# EAGLE board mic_sensor_arduino_panelized-Panel (EAGLE 9.6.2), part 1 of 3
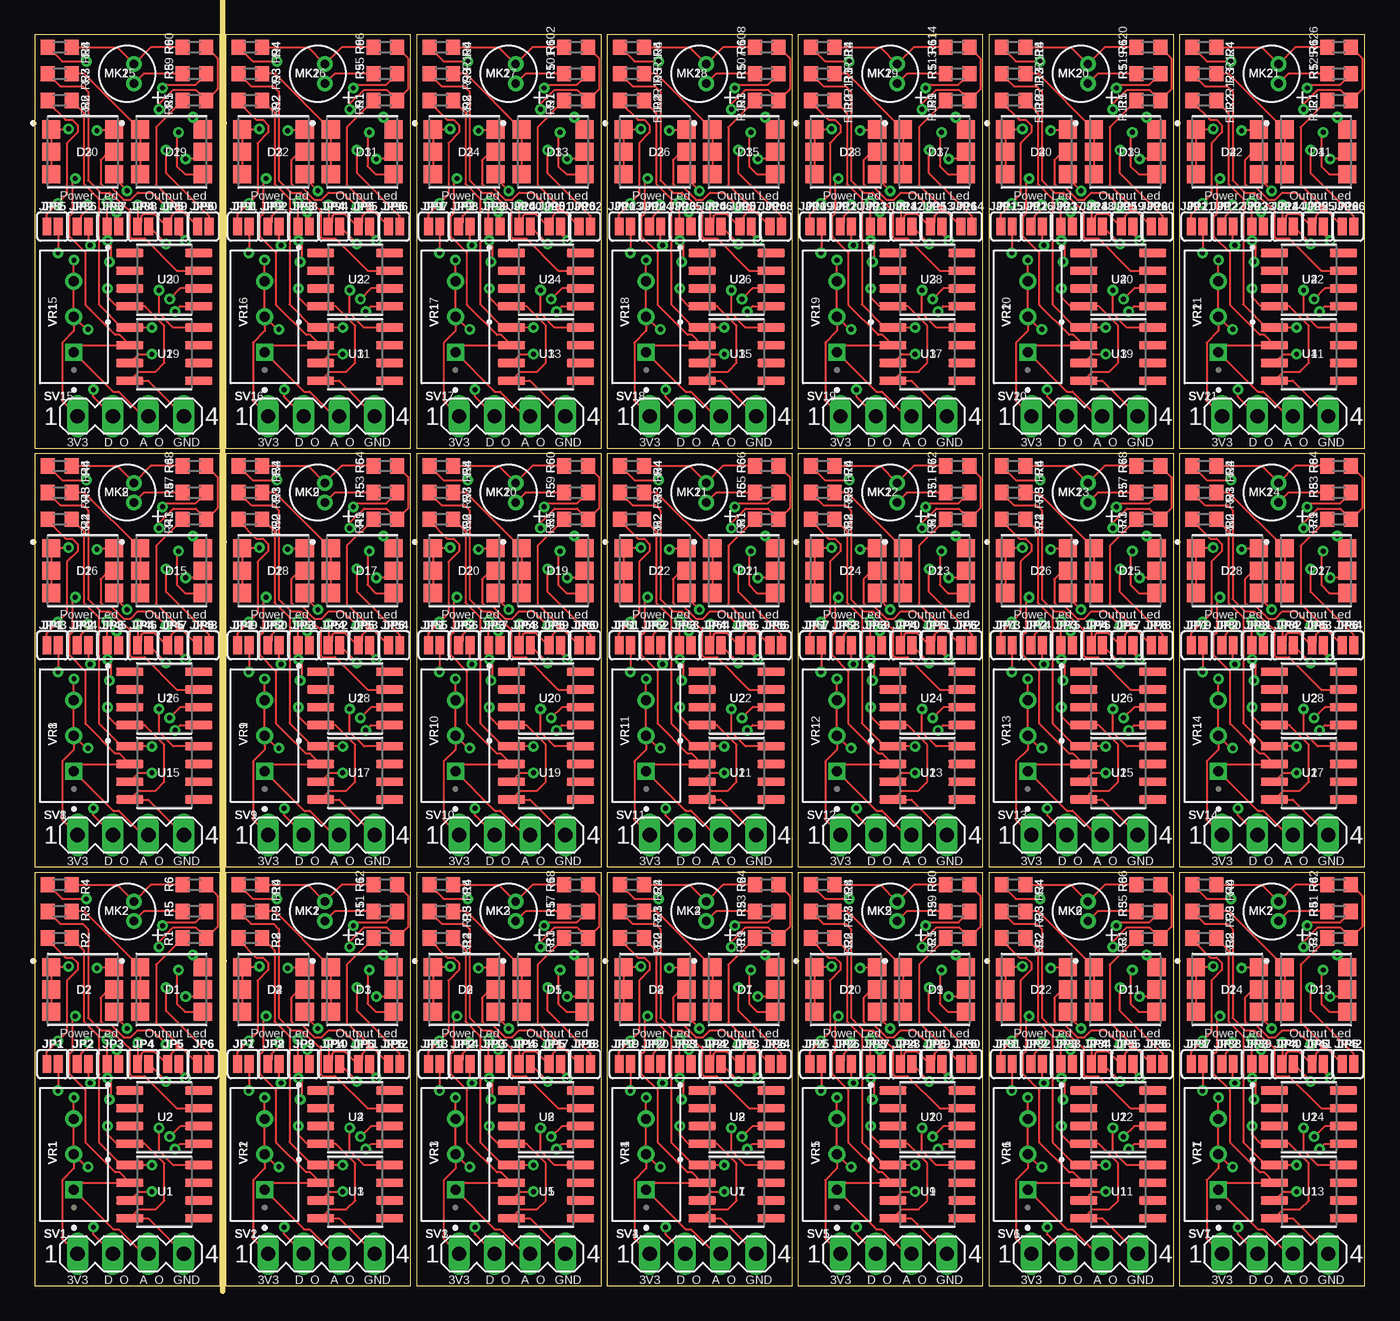
[diagram p0: board, top side]
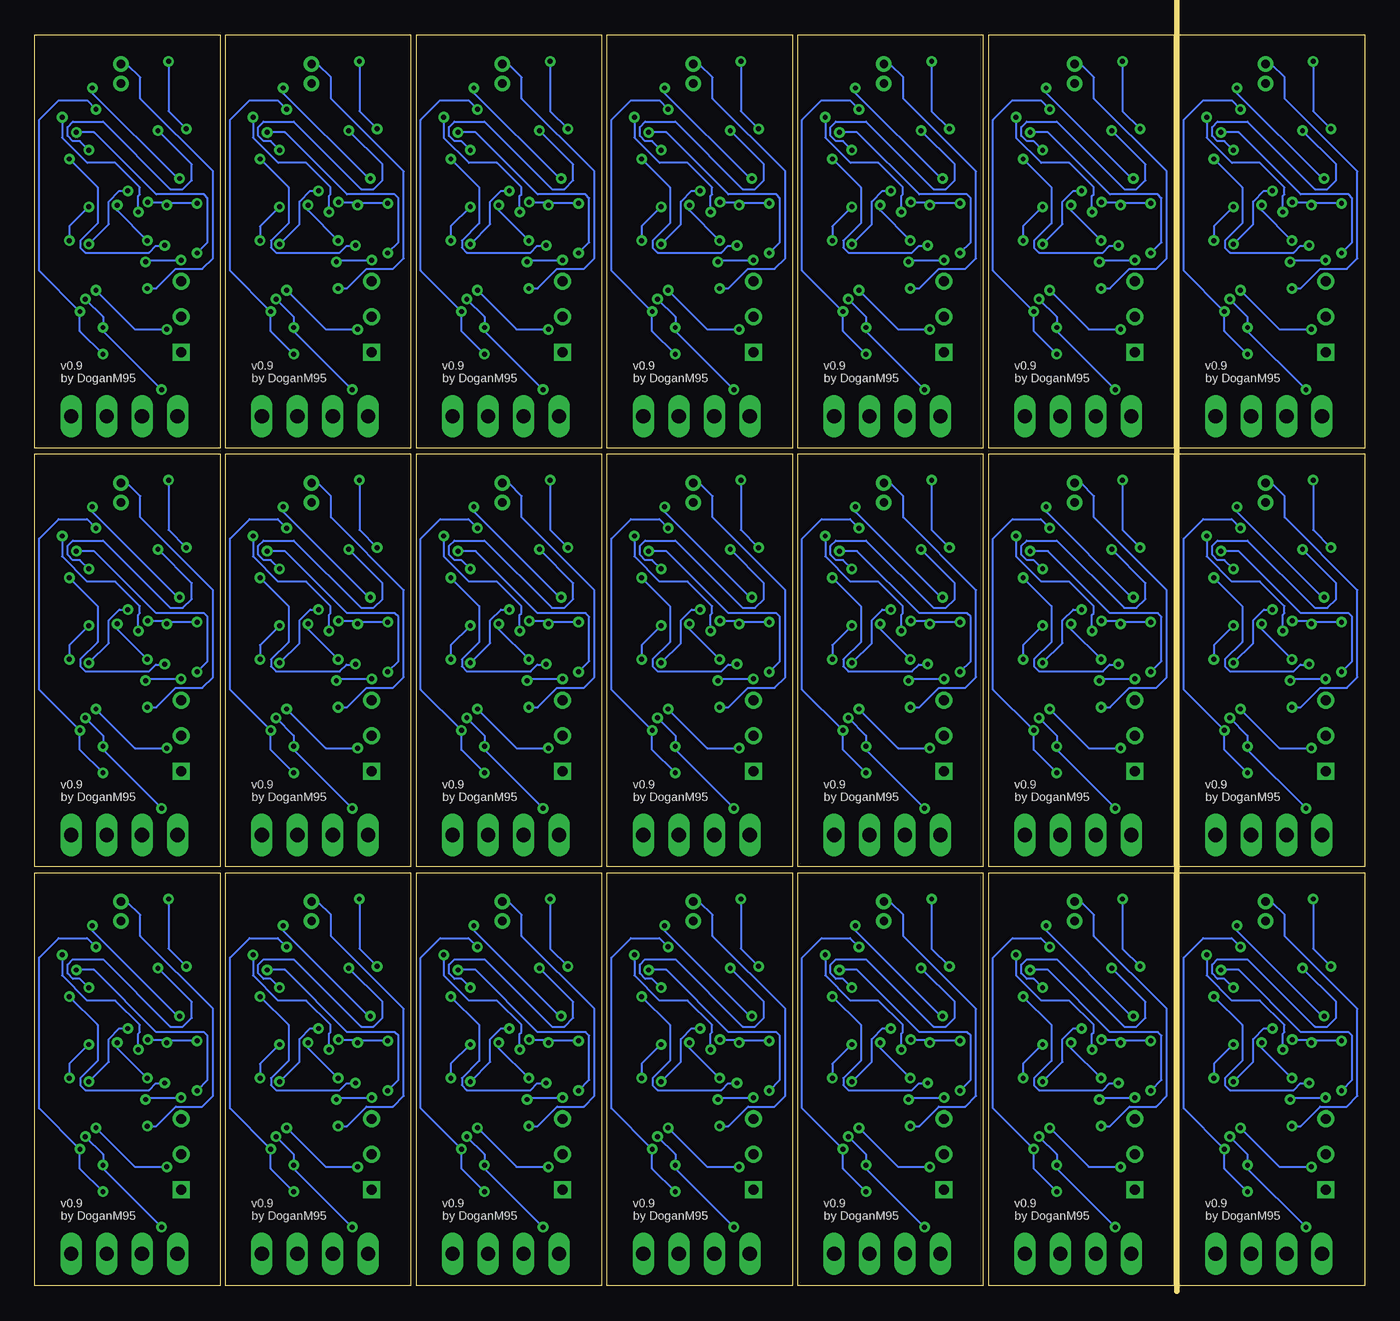
[diagram p1: board, bottom side, seen from below]

Size 95.22 x 89.54 mm. Coordinates in mm from the lower left corner, seen from the top.
Outline: 0,0 13.26,0 13.26,29.58 0,29.58 0,0
Outline: 13.66,0 26.92,0 26.92,29.58 13.66,29.58 13.66,0
Outline: 27.32,0 40.58,0 40.58,29.58 27.32,29.58 27.32,0
Outline: 40.98,0 54.24,0 54.24,29.58 40.98,29.58 40.98,0
Outline: 54.64,0 67.9,0 67.9,29.58 54.64,29.58 54.64,0
Outline: 68.3,0 81.56,0 81.56,29.58 68.3,29.58 68.3,0
Outline: 81.96,0 95.22,0 95.22,29.58 81.96,29.58 81.96,0
Outline: 0,29.98 13.26,29.98 13.26,59.56 0,59.56 0,29.98
Outline: 13.66,29.98 26.92,29.98 26.92,59.56 13.66,59.56 13.66,29.98
Outline: 27.32,29.98 40.58,29.98 40.58,59.56 27.32,59.56 27.32,29.98
Outline: 40.98,29.98 54.24,29.98 54.24,59.56 40.98,59.56 40.98,29.98
Outline: 54.64,29.98 67.9,29.98 67.9,59.56 54.64,59.56 54.64,29.98
Outline: 68.3,29.98 81.56,29.98 81.56,59.56 68.3,59.56 68.3,29.98
Outline: 81.96,29.98 95.22,29.98 95.22,59.56 81.96,59.56 81.96,29.98
Outline: 0,59.96 13.26,59.96 13.26,89.54 0,89.54 0,59.96
Outline: 13.66,59.96 26.92,59.96 26.92,89.54 13.66,89.54 13.66,59.96
Outline: 27.32,59.96 40.58,59.96 40.58,89.54 27.32,89.54 27.32,59.96
Outline: 40.98,59.96 54.24,59.96 54.24,89.54 40.98,89.54 40.98,59.96
Outline: 54.64,59.96 67.9,59.96 67.9,89.54 54.64,89.54 54.64,59.96
Outline: 68.3,59.96 81.56,59.96 81.56,89.54 68.3,89.54 68.3,59.96
Outline: 81.96,59.96 95.22,59.96 95.22,89.54 81.96,89.54 81.96,59.96
Copper layers (1*16): Top 0.035mm / dielectric 1.5mm / Bottom 0.035mm
Design rules "mic_sensor_arduino_panelized": minimum track width 6mil, minimum drill 0.35mm, track to track 6mil, track to pad 6mil, pad to pad 6mil, via to via 6mil, smd to smd 6mil, copper to edge 40mil, drill to drill 6mil, minimum pad ring 10mil, minimum via ring 8mil, stop-mask expansion 4mil, vias tented up to drill 20mil, thermal gap 10mil
Milling: 1 lines

## Footprints (pad centres in the part's own frame; a part is rotated, then mirrored left to right if it is on the bottom)
LED_LTST-G563ZEGBW = smd 1.3 x 1.3: 1 -2.25,1.6; 2 -2.25,0; 3 -2.25,-1.6; 4 2.25,-1.6; 5 2.25,0; 6 2.25,1.6
SMT-JUMPER_2_NO_SILK = smd 0.635 x 1.27: 1 -0.406,0; 2 0.406,0
MIC_CMC-4015-40P = drill 0.6: M 0.5,0.7; P 0.5,-0.7
R0603 = smd 1 x 1.1: 1 -0.85,0; 2 0.85,0
MA04-1 = drill 1.016 long: 1 -3.81,0; 2 -1.27,0; 3 1.27,0; 4 3.81,0
SOIC127P599X175-8N = smd 1.97 x 0.6: 1 -2.47,1.905; 2 -2.47,0.635; 3 -2.47,-0.635; 4 -2.47,-1.905; 5 2.47,-1.905; 6 2.47,-0.635; 7 2.47,0.635; 8 2.47,1.905
TRIM_3296W-1-103RLF = drill 0.71 square: 1 -2.54,0 | drill 0.71: 2 0,0; 3 2.54,0

## Placement (x,y rotation side)
D1  OUT_LTST-G563ZEGBW  [LED_LTST-G563ZEGBW]  9.78,21.21 0 top
D2  PWR_LTST-G563ZEGBW  [LED_LTST-G563ZEGBW]  3.43,21.21 0 top
D3  OUT_LTST-G563ZEGBW  [LED_LTST-G563ZEGBW]  23.44,21.21 0 top
D4  PWR_LTST-G563ZEGBW  [LED_LTST-G563ZEGBW]  17.09,21.21 0 top
D5  OUT_LTST-G563ZEGBW  [LED_LTST-G563ZEGBW]  37.1,21.21 0 top
D6  PWR_LTST-G563ZEGBW  [LED_LTST-G563ZEGBW]  30.75,21.21 0 top
D7  OUT_LTST-G563ZEGBW  [LED_LTST-G563ZEGBW]  50.76,21.21 0 top
D8  PWR_LTST-G563ZEGBW  [LED_LTST-G563ZEGBW]  44.41,21.21 0 top
D9  OUT_LTST-G563ZEGBW  [LED_LTST-G563ZEGBW]  64.42,21.21 0 top
D10  PWR_LTST-G563ZEGBW  [LED_LTST-G563ZEGBW]  58.07,21.21 0 top
D11  OUT_LTST-G563ZEGBW  [LED_LTST-G563ZEGBW]  78.08,21.21 0 top
D12  PWR_LTST-G563ZEGBW  [LED_LTST-G563ZEGBW]  71.73,21.21 0 top
D13  OUT_LTST-G563ZEGBW  [LED_LTST-G563ZEGBW]  91.74,21.21 0 top
D14  PWR_LTST-G563ZEGBW  [LED_LTST-G563ZEGBW]  85.39,21.21 0 top
D15  OUT_LTST-G563ZEGBW  [LED_LTST-G563ZEGBW]  9.78,51.19 0 top
D16  PWR_LTST-G563ZEGBW  [LED_LTST-G563ZEGBW]  3.43,51.19 0 top
D17  OUT_LTST-G563ZEGBW  [LED_LTST-G563ZEGBW]  23.44,51.19 0 top
D18  PWR_LTST-G563ZEGBW  [LED_LTST-G563ZEGBW]  17.09,51.19 0 top
D19  OUT_LTST-G563ZEGBW  [LED_LTST-G563ZEGBW]  37.1,51.19 0 top
D20  PWR_LTST-G563ZEGBW  [LED_LTST-G563ZEGBW]  30.75,51.19 0 top
D21  OUT_LTST-G563ZEGBW  [LED_LTST-G563ZEGBW]  50.76,51.19 0 top
D22  PWR_LTST-G563ZEGBW  [LED_LTST-G563ZEGBW]  44.41,51.19 0 top
D23  OUT_LTST-G563ZEGBW  [LED_LTST-G563ZEGBW]  64.42,51.19 0 top
D24  PWR_LTST-G563ZEGBW  [LED_LTST-G563ZEGBW]  58.07,51.19 0 top
D25  OUT_LTST-G563ZEGBW  [LED_LTST-G563ZEGBW]  78.08,51.19 0 top
D26  PWR_LTST-G563ZEGBW  [LED_LTST-G563ZEGBW]  71.73,51.19 0 top
D27  OUT_LTST-G563ZEGBW  [LED_LTST-G563ZEGBW]  91.74,51.19 0 top
D28  PWR_LTST-G563ZEGBW  [LED_LTST-G563ZEGBW]  85.39,51.19 0 top
D29  OUT_LTST-G563ZEGBW  [LED_LTST-G563ZEGBW]  9.78,81.17 0 top
D30  PWR_LTST-G563ZEGBW  [LED_LTST-G563ZEGBW]  3.43,81.17 0 top
D31  OUT_LTST-G563ZEGBW  [LED_LTST-G563ZEGBW]  23.44,81.17 0 top
D32  PWR_LTST-G563ZEGBW  [LED_LTST-G563ZEGBW]  17.09,81.17 0 top
D33  OUT_LTST-G563ZEGBW  [LED_LTST-G563ZEGBW]  37.1,81.17 0 top
D34  PWR_LTST-G563ZEGBW  [LED_LTST-G563ZEGBW]  30.75,81.17 0 top
D35  OUT_LTST-G563ZEGBW  [LED_LTST-G563ZEGBW]  50.76,81.17 0 top
D36  PWR_LTST-G563ZEGBW  [LED_LTST-G563ZEGBW]  44.41,81.17 0 top
D37  OUT_LTST-G563ZEGBW  [LED_LTST-G563ZEGBW]  64.42,81.17 0 top
D38  PWR_LTST-G563ZEGBW  [LED_LTST-G563ZEGBW]  58.07,81.17 0 top
D39  OUT_LTST-G563ZEGBW  [LED_LTST-G563ZEGBW]  78.08,81.17 0 top
D40  PWR_LTST-G563ZEGBW  [LED_LTST-G563ZEGBW]  71.73,81.17 0 top
D41  OUT_LTST-G563ZEGBW  [LED_LTST-G563ZEGBW]  91.74,81.17 0 top
D42  PWR_LTST-G563ZEGBW  [LED_LTST-G563ZEGBW]  85.39,81.17 0 top
JP1  RED  [SMT-JUMPER_2_NO_SILK]  1.27,15.88 0 top
JP2  GREEN  [SMT-JUMPER_2_NO_SILK]  3.43,15.88 0 top
JP3  BLUE  [SMT-JUMPER_2_NO_SILK]  5.59,15.88 0 top
JP4  RED  [SMT-JUMPER_2_NO_SILK]  7.75,15.88 0 top
JP5  Green  [SMT-JUMPER_2_NO_SILK]  9.91,15.88 0 top
JP6  Blue  [SMT-JUMPER_2_NO_SILK]  12.06,15.88 0 top
JP7  RED  [SMT-JUMPER_2_NO_SILK]  14.93,15.88 0 top
JP8  GREEN  [SMT-JUMPER_2_NO_SILK]  17.09,15.88 0 top
JP9  BLUE  [SMT-JUMPER_2_NO_SILK]  19.25,15.88 0 top
JP10  RED  [SMT-JUMPER_2_NO_SILK]  21.41,15.88 0 top
JP11  Green  [SMT-JUMPER_2_NO_SILK]  23.57,15.88 0 top
JP12  Blue  [SMT-JUMPER_2_NO_SILK]  25.73,15.88 0 top
JP13  RED  [SMT-JUMPER_2_NO_SILK]  28.59,15.88 0 top
JP14  GREEN  [SMT-JUMPER_2_NO_SILK]  30.75,15.88 0 top
JP15  BLUE  [SMT-JUMPER_2_NO_SILK]  32.91,15.88 0 top
JP16  RED  [SMT-JUMPER_2_NO_SILK]  35.07,15.88 0 top
JP17  Green  [SMT-JUMPER_2_NO_SILK]  37.23,15.88 0 top
JP18  Blue  [SMT-JUMPER_2_NO_SILK]  39.39,15.88 0 top
JP19  RED  [SMT-JUMPER_2_NO_SILK]  42.25,15.88 0 top
JP20  GREEN  [SMT-JUMPER_2_NO_SILK]  44.41,15.88 0 top
JP21  BLUE  [SMT-JUMPER_2_NO_SILK]  46.57,15.88 0 top
JP22  RED  [SMT-JUMPER_2_NO_SILK]  48.73,15.88 0 top
JP23  Green  [SMT-JUMPER_2_NO_SILK]  50.89,15.88 0 top
JP24  Blue  [SMT-JUMPER_2_NO_SILK]  53.05,15.88 0 top
JP25  RED  [SMT-JUMPER_2_NO_SILK]  55.91,15.88 0 top
JP26  GREEN  [SMT-JUMPER_2_NO_SILK]  58.07,15.88 0 top
JP27  BLUE  [SMT-JUMPER_2_NO_SILK]  60.23,15.88 0 top
JP28  RED  [SMT-JUMPER_2_NO_SILK]  62.39,15.88 0 top
JP29  Green  [SMT-JUMPER_2_NO_SILK]  64.55,15.88 0 top
JP30  Blue  [SMT-JUMPER_2_NO_SILK]  66.71,15.88 0 top
JP31  RED  [SMT-JUMPER_2_NO_SILK]  69.57,15.88 0 top
JP32  GREEN  [SMT-JUMPER_2_NO_SILK]  71.73,15.88 0 top
JP33  BLUE  [SMT-JUMPER_2_NO_SILK]  73.89,15.88 0 top
JP34  RED  [SMT-JUMPER_2_NO_SILK]  76.05,15.88 0 top
JP35  Green  [SMT-JUMPER_2_NO_SILK]  78.21,15.88 0 top
JP36  Blue  [SMT-JUMPER_2_NO_SILK]  80.37,15.88 0 top
JP37  RED  [SMT-JUMPER_2_NO_SILK]  83.23,15.88 0 top
JP38  GREEN  [SMT-JUMPER_2_NO_SILK]  85.39,15.88 0 top
JP39  BLUE  [SMT-JUMPER_2_NO_SILK]  87.55,15.88 0 top
JP40  RED  [SMT-JUMPER_2_NO_SILK]  89.71,15.88 0 top
JP41  Green  [SMT-JUMPER_2_NO_SILK]  91.87,15.88 0 top
JP42  Blue  [SMT-JUMPER_2_NO_SILK]  94.03,15.88 0 top
JP43  RED  [SMT-JUMPER_2_NO_SILK]  1.27,45.85 0 top
JP44  GREEN  [SMT-JUMPER_2_NO_SILK]  3.43,45.85 0 top
JP45  BLUE  [SMT-JUMPER_2_NO_SILK]  5.59,45.85 0 top
JP46  RED  [SMT-JUMPER_2_NO_SILK]  7.75,45.85 0 top
JP47  Green  [SMT-JUMPER_2_NO_SILK]  9.91,45.85 0 top
JP48  Blue  [SMT-JUMPER_2_NO_SILK]  12.06,45.85 0 top
JP49  RED  [SMT-JUMPER_2_NO_SILK]  14.93,45.85 0 top
JP50  GREEN  [SMT-JUMPER_2_NO_SILK]  17.09,45.85 0 top
JP51  BLUE  [SMT-JUMPER_2_NO_SILK]  19.25,45.85 0 top
JP52  RED  [SMT-JUMPER_2_NO_SILK]  21.41,45.85 0 top
JP53  Green  [SMT-JUMPER_2_NO_SILK]  23.57,45.85 0 top
JP54  Blue  [SMT-JUMPER_2_NO_SILK]  25.73,45.85 0 top
JP55  RED  [SMT-JUMPER_2_NO_SILK]  28.59,45.85 0 top
JP56  GREEN  [SMT-JUMPER_2_NO_SILK]  30.75,45.85 0 top
JP57  BLUE  [SMT-JUMPER_2_NO_SILK]  32.91,45.85 0 top
JP58  RED  [SMT-JUMPER_2_NO_SILK]  35.07,45.85 0 top
JP59  Green  [SMT-JUMPER_2_NO_SILK]  37.23,45.85 0 top
JP60  Blue  [SMT-JUMPER_2_NO_SILK]  39.39,45.85 0 top
JP61  RED  [SMT-JUMPER_2_NO_SILK]  42.25,45.85 0 top
JP62  GREEN  [SMT-JUMPER_2_NO_SILK]  44.41,45.85 0 top
JP63  BLUE  [SMT-JUMPER_2_NO_SILK]  46.57,45.85 0 top
JP64  RED  [SMT-JUMPER_2_NO_SILK]  48.73,45.85 0 top
JP65  Green  [SMT-JUMPER_2_NO_SILK]  50.89,45.85 0 top
JP66  Blue  [SMT-JUMPER_2_NO_SILK]  53.05,45.85 0 top
JP67  RED  [SMT-JUMPER_2_NO_SILK]  55.91,45.85 0 top
JP68  GREEN  [SMT-JUMPER_2_NO_SILK]  58.07,45.85 0 top
JP69  BLUE  [SMT-JUMPER_2_NO_SILK]  60.23,45.85 0 top
JP70  RED  [SMT-JUMPER_2_NO_SILK]  62.39,45.85 0 top
JP71  Green  [SMT-JUMPER_2_NO_SILK]  64.55,45.85 0 top
JP72  Blue  [SMT-JUMPER_2_NO_SILK]  66.71,45.85 0 top
JP73  RED  [SMT-JUMPER_2_NO_SILK]  69.57,45.85 0 top
JP74  GREEN  [SMT-JUMPER_2_NO_SILK]  71.73,45.85 0 top
JP75  BLUE  [SMT-JUMPER_2_NO_SILK]  73.89,45.85 0 top
JP76  RED  [SMT-JUMPER_2_NO_SILK]  76.05,45.85 0 top
JP77  Green  [SMT-JUMPER_2_NO_SILK]  78.21,45.85 0 top
JP78  Blue  [SMT-JUMPER_2_NO_SILK]  80.37,45.85 0 top
JP79  RED  [SMT-JUMPER_2_NO_SILK]  83.23,45.85 0 top
JP80  GREEN  [SMT-JUMPER_2_NO_SILK]  85.39,45.85 0 top
JP81  BLUE  [SMT-JUMPER_2_NO_SILK]  87.55,45.85 0 top
JP82  RED  [SMT-JUMPER_2_NO_SILK]  89.71,45.85 0 top
JP83  Green  [SMT-JUMPER_2_NO_SILK]  91.87,45.85 0 top
JP84  Blue  [SMT-JUMPER_2_NO_SILK]  94.03,45.85 0 top
JP85  RED  [SMT-JUMPER_2_NO_SILK]  1.27,75.83 0 top
JP86  GREEN  [SMT-JUMPER_2_NO_SILK]  3.43,75.83 0 top
JP87  BLUE  [SMT-JUMPER_2_NO_SILK]  5.59,75.83 0 top
JP88  RED  [SMT-JUMPER_2_NO_SILK]  7.75,75.83 0 top
JP89  Green  [SMT-JUMPER_2_NO_SILK]  9.91,75.83 0 top
JP90  Blue  [SMT-JUMPER_2_NO_SILK]  12.06,75.83 0 top
JP91  RED  [SMT-JUMPER_2_NO_SILK]  14.93,75.83 0 top
JP92  GREEN  [SMT-JUMPER_2_NO_SILK]  17.09,75.83 0 top
JP93  BLUE  [SMT-JUMPER_2_NO_SILK]  19.25,75.83 0 top
JP94  RED  [SMT-JUMPER_2_NO_SILK]  21.41,75.83 0 top
JP95  Green  [SMT-JUMPER_2_NO_SILK]  23.57,75.83 0 top
JP96  Blue  [SMT-JUMPER_2_NO_SILK]  25.73,75.83 0 top
JP97  RED  [SMT-JUMPER_2_NO_SILK]  28.59,75.83 0 top
JP98  GREEN  [SMT-JUMPER_2_NO_SILK]  30.75,75.83 0 top
JP99  BLUE  [SMT-JUMPER_2_NO_SILK]  32.91,75.83 0 top
JP100  RED  [SMT-JUMPER_2_NO_SILK]  35.07,75.83 0 top
JP101  Green  [SMT-JUMPER_2_NO_SILK]  37.23,75.83 0 top
JP102  Blue  [SMT-JUMPER_2_NO_SILK]  39.39,75.83 0 top
JP103  RED  [SMT-JUMPER_2_NO_SILK]  42.25,75.83 0 top
JP104  GREEN  [SMT-JUMPER_2_NO_SILK]  44.41,75.83 0 top
JP105  BLUE  [SMT-JUMPER_2_NO_SILK]  46.57,75.83 0 top
JP106  RED  [SMT-JUMPER_2_NO_SILK]  48.73,75.83 0 top
JP107  Green  [SMT-JUMPER_2_NO_SILK]  50.89,75.83 0 top
JP108  Blue  [SMT-JUMPER_2_NO_SILK]  53.05,75.83 0 top
JP109  RED  [SMT-JUMPER_2_NO_SILK]  55.91,75.83 0 top
JP110  GREEN  [SMT-JUMPER_2_NO_SILK]  58.07,75.83 0 top
JP111  BLUE  [SMT-JUMPER_2_NO_SILK]  60.23,75.83 0 top
JP112  RED  [SMT-JUMPER_2_NO_SILK]  62.39,75.83 0 top
JP113  Green  [SMT-JUMPER_2_NO_SILK]  64.55,75.83 0 top
JP114  Blue  [SMT-JUMPER_2_NO_SILK]  66.71,75.83 0 top
JP115  RED  [SMT-JUMPER_2_NO_SILK]  69.57,75.83 0 top
JP116  GREEN  [SMT-JUMPER_2_NO_SILK]  71.73,75.83 0 top
JP117  BLUE  [SMT-JUMPER_2_NO_SILK]  73.89,75.83 0 top
JP118  RED  [SMT-JUMPER_2_NO_SILK]  76.05,75.83 0 top
JP119  Green  [SMT-JUMPER_2_NO_SILK]  78.21,75.83 0 top
JP120  Blue  [SMT-JUMPER_2_NO_SILK]  80.37,75.83 0 top
JP121  RED  [SMT-JUMPER_2_NO_SILK]  83.23,75.83 0 top
JP122  GREEN  [SMT-JUMPER_2_NO_SILK]  85.39,75.83 0 top
JP123  BLUE  [SMT-JUMPER_2_NO_SILK]  87.55,75.83 0 top
JP124  RED  [SMT-JUMPER_2_NO_SILK]  89.71,75.83 0 top
JP125  Green  [SMT-JUMPER_2_NO_SILK]  91.87,75.83 0 top
JP126  Blue  [SMT-JUMPER_2_NO_SILK]  94.03,75.83 0 top
MK1  CMC-4015-40P  [MIC_CMC-4015-40P]  20.26,26.8 0 top
MK2  CMC-4015-40P  [MIC_CMC-4015-40P]  6.6,26.8 0 top
MK3  CMC-4015-40P  [MIC_CMC-4015-40P]  33.92,26.8 0 top
MK4  CMC-4015-40P  [MIC_CMC-4015-40P]  47.58,26.8 0 top
MK5  CMC-4015-40P  [MIC_CMC-4015-40P]  61.24,26.8 0 top
MK6  CMC-4015-40P  [MIC_CMC-4015-40P]  74.9,26.8 0 top
MK7  CMC-4015-40P  [MIC_CMC-4015-40P]  88.56,26.8 0 top
MK8  CMC-4015-40P  [MIC_CMC-4015-40P]  6.6,56.78 0 top
MK9  CMC-4015-40P  [MIC_CMC-4015-40P]  20.26,56.78 0 top
MK10  CMC-4015-40P  [MIC_CMC-4015-40P]  33.92,56.78 0 top
MK11  CMC-4015-40P  [MIC_CMC-4015-40P]  47.58,56.78 0 top
MK12  CMC-4015-40P  [MIC_CMC-4015-40P]  61.24,56.78 0 top
MK13  CMC-4015-40P  [MIC_CMC-4015-40P]  74.9,56.78 0 top
MK14  CMC-4015-40P  [MIC_CMC-4015-40P]  88.56,56.78 0 top
MK15  CMC-4015-40P  [MIC_CMC-4015-40P]  6.6,86.76 0 top
MK16  CMC-4015-40P  [MIC_CMC-4015-40P]  20.26,86.76 0 top
MK17  CMC-4015-40P  [MIC_CMC-4015-40P]  33.92,86.76 0 top
MK18  CMC-4015-40P  [MIC_CMC-4015-40P]  47.58,86.76 0 top
MK19  CMC-4015-40P  [MIC_CMC-4015-40P]  61.24,86.76 0 top
MK20  CMC-4015-40P  [MIC_CMC-4015-40P]  74.9,86.76 0 top
MK21  CMC-4015-40P  [MIC_CMC-4015-40P]  88.56,86.76 0 top
R1  100k  [R0603]  11.43,24.89 180 top
R2  10k  [R0603]  1.78,24.89 180 top
R3  10k  [R0603]  1.78,26.8 0 top
R4  1k  [R0603]  1.78,28.7 180 top
R5  150R  [R0603]  11.43,26.8 0 top
R6  100k  [R0603]  11.43,28.7 0 top
R7  100k  [R0603]  25.09,24.89 180 top
R8  10k  [R0603]  15.44,24.89 180 top
R9  10k  [R0603]  15.44,26.8 0 top
R10  1k  [R0603]  15.44,28.7 180 top
R11  150R  [R0603]  25.09,26.8 0 top
R12  100k  [R0603]  25.09,28.7 0 top
R13  100k  [R0603]  38.75,24.89 180 top
R14  10k  [R0603]  29.1,24.89 180 top
R15  10k  [R0603]  29.1,26.8 0 top
R16  1k  [R0603]  29.1,28.7 180 top
R17  150R  [R0603]  38.75,26.8 0 top
R18  100k  [R0603]  38.75,28.7 0 top
R19  100k  [R0603]  52.41,24.89 180 top
R20  10k  [R0603]  42.76,24.89 180 top
R21  10k  [R0603]  42.76,26.8 0 top
R22  1k  [R0603]  42.76,28.7 180 top
R23  150R  [R0603]  52.41,26.8 0 top
R24  100k  [R0603]  52.41,28.7 0 top
R25  100k  [R0603]  66.07,24.89 180 top
R26  10k  [R0603]  56.42,24.89 180 top
R27  10k  [R0603]  56.42,26.8 0 top
R28  1k  [R0603]  56.42,28.7 180 top
R29  150R  [R0603]  66.07,26.8 0 top
R30  100k  [R0603]  66.07,28.7 0 top
R31  100k  [R0603]  79.73,24.89 180 top
R32  10k  [R0603]  70.08,24.89 180 top
R33  10k  [R0603]  70.08,26.8 0 top
R34  1k  [R0603]  70.08,28.7 180 top
R35  150R  [R0603]  79.73,26.8 0 top
R36  100k  [R0603]  79.73,28.7 0 top
R37  100k  [R0603]  93.39,24.89 180 top
R38  10k  [R0603]  83.74,24.89 180 top
R39  10k  [R0603]  83.74,26.8 0 top
R40  1k  [R0603]  83.74,28.7 180 top
R41  150R  [R0603]  93.39,26.8 0 top
R42  100k  [R0603]  93.39,28.7 0 top
R43  100k  [R0603]  11.43,54.87 180 top
R44  10k  [R0603]  1.78,54.87 180 top
R45  10k  [R0603]  1.78,56.78 0 top
R46  1k  [R0603]  1.78,58.68 180 top
R47  150R  [R0603]  11.43,56.78 0 top
R48  100k  [R0603]  11.43,58.68 0 top
R49  100k  [R0603]  25.09,54.87 180 top
R50  10k  [R0603]  15.44,54.87 180 top
R51  10k  [R0603]  15.44,56.78 0 top
R52  1k  [R0603]  15.44,58.68 180 top
R53  150R  [R0603]  25.09,56.78 0 top
R54  100k  [R0603]  25.09,58.68 0 top
R55  100k  [R0603]  38.75,54.87 180 top
R56  10k  [R0603]  29.1,54.87 180 top
R57  10k  [R0603]  29.1,56.78 0 top
R58  1k  [R0603]  29.1,58.68 180 top
R59  150R  [R0603]  38.75,56.78 0 top
R60  100k  [R0603]  38.75,58.68 0 top
R61  100k  [R0603]  52.41,54.87 180 top
R62  10k  [R0603]  42.76,54.87 180 top
R63  10k  [R0603]  42.76,56.78 0 top
R64  1k  [R0603]  42.76,58.68 180 top
R65  150R  [R0603]  52.41,56.78 0 top
R66  100k  [R0603]  52.41,58.68 0 top
R67  100k  [R0603]  66.07,54.87 180 top
R68  10k  [R0603]  56.42,54.87 180 top
R69  10k  [R0603]  56.42,56.78 0 top
R70  1k  [R0603]  56.42,58.68 180 top
R71  150R  [R0603]  66.07,56.78 0 top
R72  100k  [R0603]  66.07,58.68 0 top
R73  100k  [R0603]  79.73,54.87 180 top
R74  10k  [R0603]  70.08,54.87 180 top
R75  10k  [R0603]  70.08,56.78 0 top
R76  1k  [R0603]  70.08,58.68 180 top
R77  150R  [R0603]  79.73,56.78 0 top
R78  100k  [R0603]  79.73,58.68 0 top
R79  100k  [R0603]  93.39,54.87 180 top
R80  10k  [R0603]  83.74,54.87 180 top
R81  10k  [R0603]  83.74,56.78 0 top
R82  1k  [R0603]  83.74,58.68 180 top
R83  150R  [R0603]  93.39,56.78 0 top
R84  100k  [R0603]  93.39,58.68 0 top
R85  100k  [R0603]  11.43,84.85 180 top
R86  10k  [R0603]  1.78,84.85 180 top
R87  10k  [R0603]  1.78,86.76 0 top
R88  1k  [R0603]  1.78,88.66 180 top
R89  150R  [R0603]  11.43,86.76 0 top
R90  100k  [R0603]  11.43,88.66 0 top
R91  100k  [R0603]  25.09,84.85 180 top
R92  10k  [R0603]  15.44,84.85 180 top
R93  10k  [R0603]  15.44,86.76 0 top
R94  1k  [R0603]  15.44,88.66 180 top
R95  150R  [R0603]  25.09,86.76 0 top
R96  100k  [R0603]  25.09,88.66 0 top
R97  100k  [R0603]  38.75,84.85 180 top
R98  10k  [R0603]  29.1,84.85 180 top
R99  10k  [R0603]  29.1,86.76 0 top
R100  1k  [R0603]  29.1,88.66 180 top
R101  150R  [R0603]  38.75,86.76 0 top
R102  100k  [R0603]  38.75,88.66 0 top
R103  100k  [R0603]  52.41,84.85 180 top
R104  10k  [R0603]  42.76,84.85 180 top
R105  10k  [R0603]  42.76,86.76 0 top
R106  1k  [R0603]  42.76,88.66 180 top
R107  150R  [R0603]  52.41,86.76 0 top
R108  100k  [R0603]  52.41,88.66 0 top
R109  100k  [R0603]  66.07,84.85 180 top
R110  10k  [R0603]  56.42,84.85 180 top
R111  10k  [R0603]  56.42,86.76 0 top
R112  1k  [R0603]  56.42,88.66 180 top
R113  150R  [R0603]  66.07,86.76 0 top
R114  100k  [R0603]  66.07,88.66 0 top
R115  100k  [R0603]  79.73,84.85 180 top
R116  10k  [R0603]  70.08,84.85 180 top
R117  10k  [R0603]  70.08,86.76 0 top
R118  1k  [R0603]  70.08,88.66 180 top
R119  150R  [R0603]  79.73,86.76 0 top
R120  100k  [R0603]  79.73,88.66 0 top
R121  100k  [R0603]  93.39,84.85 180 top
R122  10k  [R0603]  83.74,84.85 180 top
R123  10k  [R0603]  83.74,86.76 0 top
R124  1k  [R0603]  83.74,88.66 180 top
R125  150R  [R0603]  93.39,86.76 0 top
R126  100k  [R0603]  93.39,88.66 0 top
SV1  [MA04-1]  6.86,2.29 0 top
SV2  [MA04-1]  20.52,2.29 0 top
SV3  [MA04-1]  34.18,2.29 0 top
SV4  [MA04-1]  47.84,2.29 0 top
SV5  [MA04-1]  61.5,2.29 0 top
SV6  [MA04-1]  75.16,2.29 0 top
SV7  [MA04-1]  88.82,2.29 0 top
SV8  [MA04-1]  6.86,32.27 0 top
SV9  [MA04-1]  20.52,32.27 0 top
SV10  [MA04-1]  34.18,32.27 0 top
SV11  [MA04-1]  47.84,32.27 0 top
SV12  [MA04-1]  61.5,32.27 0 top
SV13  [MA04-1]  75.16,32.27 0 top
SV14  [MA04-1]  88.82,32.27 0 top
SV15  [MA04-1]  6.86,62.25 0 top
SV16  [MA04-1]  20.52,62.25 0 top
SV17  [MA04-1]  34.18,62.25 0 top
SV18  [MA04-1]  47.84,62.25 0 top
SV19  [MA04-1]  61.5,62.25 0 top
SV20  [MA04-1]  75.16,62.25 0 top
SV21  [MA04-1]  88.82,62.25 0 top
U1  LM393DR  [SOIC127P599X175-8N]  9.27,6.73 0 top
U2  LM393DR  [SOIC127P599X175-8N]  9.27,12.06 0 top
U3  LM393DR  [SOIC127P599X175-8N]  22.93,6.73 0 top
U4  LM393DR  [SOIC127P599X175-8N]  22.93,12.06 0 top
U5  LM393DR  [SOIC127P599X175-8N]  36.59,6.73 0 top
U6  LM393DR  [SOIC127P599X175-8N]  36.59,12.06 0 top
U7  LM393DR  [SOIC127P599X175-8N]  50.25,6.73 0 top
U8  LM393DR  [SOIC127P599X175-8N]  50.25,12.06 0 top
U9  LM393DR  [SOIC127P599X175-8N]  63.91,6.73 0 top
U10  LM393DR  [SOIC127P599X175-8N]  63.91,12.06 0 top
U11  LM393DR  [SOIC127P599X175-8N]  77.57,6.73 0 top
U12  LM393DR  [SOIC127P599X175-8N]  77.57,12.06 0 top
U13  LM393DR  [SOIC127P599X175-8N]  91.23,6.73 0 top
U14  LM393DR  [SOIC127P599X175-8N]  91.23,12.06 0 top
U15  LM393DR  [SOIC127P599X175-8N]  9.27,36.71 0 top
U16  LM393DR  [SOIC127P599X175-8N]  9.27,42.04 0 top
U17  LM393DR  [SOIC127P599X175-8N]  22.93,36.71 0 top
U18  LM393DR  [SOIC127P599X175-8N]  22.93,42.04 0 top
U19  LM393DR  [SOIC127P599X175-8N]  36.59,36.71 0 top
U20  LM393DR  [SOIC127P599X175-8N]  36.59,42.04 0 top
U21  LM393DR  [SOIC127P599X175-8N]  50.25,36.71 0 top
U22  LM393DR  [SOIC127P599X175-8N]  50.25,42.04 0 top
U23  LM393DR  [SOIC127P599X175-8N]  63.91,36.71 0 top
U24  LM393DR  [SOIC127P599X175-8N]  63.91,42.04 0 top
U25  LM393DR  [SOIC127P599X175-8N]  77.57,36.71 0 top
U26  LM393DR  [SOIC127P599X175-8N]  77.57,42.04 0 top
U27  LM393DR  [SOIC127P599X175-8N]  91.23,36.71 0 top
U28  LM393DR  [SOIC127P599X175-8N]  91.23,42.04 0 top
U29  LM393DR  [SOIC127P599X175-8N]  9.27,66.69 0 top
U30  LM393DR  [SOIC127P599X175-8N]  9.27,72.02 0 top
U31  LM393DR  [SOIC127P599X175-8N]  22.93,66.69 0 top
U32  LM393DR  [SOIC127P599X175-8N]  22.93,72.02 0 top
U33  LM393DR  [SOIC127P599X175-8N]  36.59,66.69 0 top
U34  LM393DR  [SOIC127P599X175-8N]  36.59,72.02 0 top
U35  LM393DR  [SOIC127P599X175-8N]  50.25,66.69 0 top
U36  LM393DR  [SOIC127P599X175-8N]  50.25,72.02 0 top
U37  LM393DR  [SOIC127P599X175-8N]  63.91,66.69 0 top
U38  LM393DR  [SOIC127P599X175-8N]  63.91,72.02 0 top
U39  LM393DR  [SOIC127P599X175-8N]  77.57,66.69 0 top
U40  LM393DR  [SOIC127P599X175-8N]  77.57,72.02 0 top
U41  LM393DR  [SOIC127P599X175-8N]  91.23,66.69 0 top
U42  LM393DR  [SOIC127P599X175-8N]  91.23,72.02 0 top
VR1  3296W-1-103RLF  [TRIM_3296W-1-103RLF]  2.79,9.4 90 top
VR2  3296W-1-103RLF  [TRIM_3296W-1-103RLF]  16.45,9.4 90 top
VR3  3296W-1-103RLF  [TRIM_3296W-1-103RLF]  30.11,9.4 90 top
VR4  3296W-1-103RLF  [TRIM_3296W-1-103RLF]  43.77,9.4 90 top
VR5  3296W-1-103RLF  [TRIM_3296W-1-103RLF]  57.43,9.4 90 top
VR6  3296W-1-103RLF  [TRIM_3296W-1-103RLF]  71.09,9.4 90 top
VR7  3296W-1-103RLF  [TRIM_3296W-1-103RLF]  84.75,9.4 90 top
VR8  3296W-1-103RLF  [TRIM_3296W-1-103RLF]  2.79,39.38 90 top
VR9  3296W-1-103RLF  [TRIM_3296W-1-103RLF]  16.45,39.38 90 top
VR10  3296W-1-103RLF  [TRIM_3296W-1-103RLF]  30.11,39.38 90 top
VR11  3296W-1-103RLF  [TRIM_3296W-1-103RLF]  43.77,39.38 90 top
VR12  3296W-1-103RLF  [TRIM_3296W-1-103RLF]  57.43,39.38 90 top
VR13  3296W-1-103RLF  [TRIM_3296W-1-103RLF]  71.09,39.38 90 top
VR14  3296W-1-103RLF  [TRIM_3296W-1-103RLF]  84.75,39.38 90 top
VR15  3296W-1-103RLF  [TRIM_3296W-1-103RLF]  2.79,69.36 90 top
VR16  3296W-1-103RLF  [TRIM_3296W-1-103RLF]  16.45,69.36 90 top
VR17  3296W-1-103RLF  [TRIM_3296W-1-103RLF]  30.11,69.36 90 top
VR18  3296W-1-103RLF  [TRIM_3296W-1-103RLF]  43.77,69.36 90 top
VR19  3296W-1-103RLF  [TRIM_3296W-1-103RLF]  57.43,69.36 90 top
VR20  3296W-1-103RLF  [TRIM_3296W-1-103RLF]  71.09,69.36 90 top
VR21  3296W-1-103RLF  [TRIM_3296W-1-103RLF]  84.75,69.36 90 top

## Library data of the parts
D1-D42 = LTST-G563ZEGBW; AVAILABILITY: Not in stock; CHECK_PRICES: https://www.snapeda.com/parts/LTST-G563ZEGBW/Lite-On/view-part/?ref=eda; DESCRIPTION: LED; SMD; 5050, PLCC6; RGB; 5x5x1.6mm; 120°; 20mA; Lens: transparent; MF: Lite-On; MP: LTST-G563ZEGBW; PACKAGE: PLCC-6 Lite-On; PRICE: None; SNAPEDA_LINK: https://www.snapeda.com/parts/LTST-G563ZEGBW/Lite-On/view-part/?ref=snap
JP1-JP126 = SparkFun-Jumpers
MK1-MK21 = CMC-4015-40P; AVAILABILITY: In Stock; CHECK_PRICES: https://www.snapeda.com/parts/CMC-4015-40P/CUI+Devices/view-part/?ref=eda; CUI_PURCHASE_URL: https://www.cuidevices.com/product/audio/microphones/electret-condenser-microphones/cmc-4015-40p?utm_source=snapeda.com&utm_medium=referral&utm_campaign=snapedaBOM; DESCRIPTION: 4.0 mm, Omnidirectional, PCB Mount, 2.0 Vdc, Electret Condenser Microphone; MF: CUI Devices; MP: CMC-4015-40P; PACKAGE: None; PRICE: None; PURCHASE-URL: https://www.snapeda.com/api/url_track_click_mouser/?unipart_id=1814008&manufacturer=CUI Devices&part_name=CMC-4015-40P&search_term=cmc-4015-40p; SNAPEDA_LINK: https://www.snapeda.com/parts/CMC-4015-40P/CUI+Devices/view-part/?ref=snap
R1-R126 = resistor
SV1-SV21 = con-lstb; OC_FARNELL: unknown; OC_NEWARK: unknown
U1-U42 = LM393DR; AVAILABILITY: In Stock; CHECK_PRICES: https://www.snapeda.com/parts/LM393DR/Texas+Instruments/view-part/?ref=eda; DESCRIPTION: Dual differential comparator, commercial grade; MF: Texas Instruments; MP: LM393DR; PACKAGE: SOIC-8 Texas Instruments; PRICE: None; PURCHASE-URL: https://www.snapeda.com/api/url_track_click_mouser/?unipart_id=6437&manufacturer=Texas Instruments&part_name=LM393DR&search_term=lm393dr; SNAPEDA_LINK: https://www.snapeda.com/parts/LM393DR/Texas+Instruments/view-part/?ref=snap
VR1-VR21 = 3296W-1-103RLF; AVAILABILITY: In Stock; CHECK_PRICES: https://www.snapeda.com/parts/3296W-1-103RLF/Bourns/view-part/?ref=eda; DESCRIPTION: Trimmer, Cermet, Rest 10 Kilohms, PCB, 25 Turns, Pwr-Rtg 0.5W | Bourns 3296W-1-103RLF; MF: Bourns; MP: 3296W-1-103RLF; PACKAGE: NON STANDARD-3 Bourns; PRICE: None; PURCHASE-URL: https://www.snapeda.com/api/url_track_click_mouser/?unipart_id=480309&manufacturer=Bourns&part_name=3296W-1-103RLF&search_term=None; SNAPEDA_LINK: https://www.snapeda.com/parts/3296W-1-103RLF/Bourns/view-part/?ref=snap

## Nets
2IN+: R1.1 R6.2 U1.3 U2.5
2IN+1: R7.1 R12.2 U3.3 U4.5
2IN+2: R13.1 R18.2 U5.3 U6.5
2IN+3: R19.1 R24.2 U7.3 U8.5
2IN+4: R25.1 R30.2 U9.3 U10.5
2IN+5: R31.1 R36.2 U11.3 U12.5
2IN+6: R37.1 R42.2 U13.3 U14.5
2IN+7: R43.1 R48.2 U15.3 U16.5
2IN+8: R49.1 R54.2 U17.3 U18.5
2IN+9: R55.1 R60.2 U19.3 U20.5
2IN+10: R61.1 R66.2 U21.3 U22.5
2IN+11: R67.1 R72.2 U23.3 U24.5
2IN+12: R73.1 R78.2 U25.3 U26.5
2IN+13: R79.1 R84.2 U27.3 U28.5
2IN+14: R85.1 R90.2 U29.3 U30.5
2IN+15: R91.1 R96.2 U31.3 U32.5
2IN+16: R97.1 R102.2 U33.3 U34.5
2IN+17: R103.1 R108.2 U35.3 U36.5
2IN+18: R109.1 R114.2 U37.3 U38.5
2IN+19: R115.1 R120.2 U39.3 U40.5
2IN+20: R121.1 R126.2 U41.3 U42.5
2OUT: R3.1 U2.7
2OUT1: R9.1 U4.7
2OUT2: R15.1 U6.7
2OUT3: R21.1 U8.7
2OUT4: R27.1 U10.7
2OUT5: R33.1 U12.7
2OUT6: R39.1 U14.7
2OUT7: R45.1 U16.7
2OUT8: R51.1 U18.7
2OUT9: R57.1 U20.7
2OUT10: R63.1 U22.7
2OUT11: R69.1 U24.7
2OUT12: R75.1 U26.7
2OUT13: R81.1 U28.7
2OUT14: R87.1 U30.7
2OUT15: R93.1 U32.7
2OUT16: R99.1 U34.7
2OUT17: R105.1 U36.7
2OUT18: R111.1 U38.7
2OUT19: R117.1 U40.7
2OUT20: R123.1 U42.7
3V1: JP7.1 JP8.1 JP9.1 JP10.1 JP11.1 JP12.1 R7.2 R8.2 SV2.1 U3.8 VR2.2 VR2.3
3V2: JP13.1 JP14.1 JP15.1 JP16.1 JP17.1 JP18.1 R13.2 R14.2 SV3.1 U5.8 VR3.2 VR3.3
3V3: JP1.1 JP2.1 JP3.1 JP4.1 JP5.1 JP6.1 R1.2 R2.2 SV1.1 U1.8 VR1.2 VR1.3
3V4: JP19.1 JP20.1 JP21.1 JP22.1 JP23.1 JP24.1 R19.2 R20.2 SV4.1 U7.8 VR4.2 VR4.3
3V5: JP25.1 JP26.1 JP27.1 JP28.1 JP29.1 JP30.1 R25.2 R26.2 SV5.1 U9.8 VR5.2 VR5.3
3V6: JP31.1 JP32.1 JP33.1 JP34.1 JP35.1 JP36.1 R31.2 R32.2 SV6.1 U11.8 VR6.2 VR6.3
3V7: JP37.1 JP38.1 JP39.1 JP40.1 JP41.1 JP42.1 R37.2 R38.2 SV7.1 U13.8 VR7.2 VR7.3
3V8: JP43.1 JP44.1 JP45.1 JP46.1 JP47.1 JP48.1 R43.2 R44.2 SV8.1 U15.8 VR8.2 VR8.3
3V9: JP49.1 JP50.1 JP51.1 JP52.1 JP53.1 JP54.1 R49.2 R50.2 SV9.1 U17.8 VR9.2 VR9.3
3V10: JP55.1 JP56.1 JP57.1 JP58.1 JP59.1 JP60.1 R55.2 R56.2 SV10.1 U19.8 VR10.2 VR10.3
3V11: JP61.1 JP62.1 JP63.1 JP64.1 JP65.1 JP66.1 R61.2 R62.2 SV11.1 U21.8 VR11.2 VR11.3
3V12: JP67.1 JP68.1 JP69.1 JP70.1 JP71.1 JP72.1 R67.2 R68.2 SV12.1 U23.8 VR12.2 VR12.3
3V13: JP73.1 JP74.1 JP75.1 JP76.1 JP77.1 JP78.1 R73.2 R74.2 SV13.1 U25.8 VR13.2 VR13.3
3V14: JP79.1 JP80.1 JP81.1 JP82.1 JP83.1 JP84.1 R79.2 R80.2 SV14.1 U27.8 VR14.2 VR14.3
3V15: JP85.1 JP86.1 JP87.1 JP88.1 JP89.1 JP90.1 R85.2 R86.2 SV15.1 U29.8 VR15.2 VR15.3
3V16: JP91.1 JP92.1 JP93.1 JP94.1 JP95.1 JP96.1 R91.2 R92.2 SV16.1 U31.8 VR16.2 VR16.3
3V17: JP97.1 JP98.1 JP99.1 JP100.1 JP101.1 JP102.1 R97.2 R98.2 SV17.1 U33.8 VR17.2 VR17.3
3V18: JP103.1 JP104.1 JP105.1 JP106.1 JP107.1 JP108.1 R103.2 R104.2 SV18.1 U35.8 VR18.2 VR18.3
3V19: JP109.1 JP110.1 JP111.1 JP112.1 JP113.1 JP114.1 R109.2 R110.2 SV19.1 U37.8 VR19.2 VR19.3
3V20: JP115.1 JP116.1 JP117.1 JP118.1 JP119.1 JP120.1 R115.2 R116.2 SV20.1 U39.8 VR20.2 VR20.3
3V21: JP121.1 JP122.1 JP123.1 JP124.1 JP125.1 JP126.1 R121.2 R122.2 SV21.1 U41.8 VR21.2 VR21.3
A_OUT: R5.2 SV1.3 U1.2 VR1.1
A_OUT1: R11.2 SV2.3 U3.2 VR2.1
A_OUT2: R17.2 SV3.3 U5.2 VR3.1
A_OUT3: R23.2 SV4.3 U7.2 VR4.1
A_OUT4: R29.2 SV5.3 U9.2 VR5.1
A_OUT5: R35.2 SV6.3 U11.2 VR6.1
A_OUT6: R41.2 SV7.3 U13.2 VR7.1
A_OUT7: R47.2 SV8.3 U15.2 VR8.1
A_OUT8: R53.2 SV9.3 U17.2 VR9.1
A_OUT9: R59.2 SV10.3 U19.2 VR10.1
A_OUT10: R65.2 SV11.3 U21.2 VR11.1
A_OUT11: R71.2 SV12.3 U23.2 VR12.1
A_OUT12: R77.2 SV13.3 U25.2 VR13.1
A_OUT13: R83.2 SV14.3 U27.2 VR14.1
A_OUT14: R89.2 SV15.3 U29.2 VR15.1
A_OUT15: R95.2 SV16.3 U31.2 VR16.1
A_OUT16: R101.2 SV17.3 U33.2 VR17.1
A_OUT17: R107.2 SV18.3 U35.2 VR18.1
A_OUT18: R113.2 SV19.3 U37.2 VR19.1
A_OUT19: R119.2 SV20.3 U39.2 VR20.1
A_OUT20: R125.2 SV21.3 U41.2 VR21.1
D_OUT: R2.1 SV1.2 U1.1 U2.6
D_OUT1: R8.1 SV2.2 U3.1 U4.6
D_OUT2: R14.1 SV3.2 U5.1 U6.6
D_OUT3: R20.1 SV4.2 U7.1 U8.6
D_OUT4: R26.1 SV5.2 U9.1 U10.6
D_OUT5: R32.1 SV6.2 U11.1 U12.6
D_OUT6: R38.1 SV7.2 U13.1 U14.6
D_OUT7: R44.1 SV8.2 U15.1 U16.6
D_OUT8: R50.1 SV9.2 U17.1 U18.6
D_OUT9: R56.1 SV10.2 U19.1 U20.6
D_OUT10: R62.1 SV11.2 U21.1 U22.6
D_OUT11: R68.1 SV12.2 U23.1 U24.6
D_OUT12: R74.1 SV13.2 U25.1 U26.6
D_OUT13: R80.1 SV14.2 U27.1 U28.6
D_OUT14: R86.1 SV15.2 U29.1 U30.6
D_OUT15: R92.1 SV16.2 U31.1 U32.6
D_OUT16: R98.1 SV17.2 U33.1 U34.6
D_OUT17: R104.1 SV18.2 U35.1 U36.6
D_OUT18: R110.1 SV19.2 U37.1 U38.6
D_OUT19: R116.1 SV20.2 U39.1 U40.6
D_OUT20: R122.1 SV21.2 U41.1 U42.6
GND: MK2.M R4.1 R6.1 SV1.4 U1.4 U2.4
GND1: MK1.M R10.1 R12.1 SV2.4 U3.4 U4.4
GND2: MK3.M R16.1 R18.1 SV3.4 U5.4 U6.4
GND3: MK4.M R22.1 R24.1 SV4.4 U7.4 U8.4
GND4: MK5.M R28.1 R30.1 SV5.4 U9.4 U10.4
GND5: MK6.M R34.1 R36.1 SV6.4 U11.4 U12.4
GND6: MK7.M R40.1 R42.1 SV7.4 U13.4 U14.4
GND7: MK8.M R46.1 R48.1 SV8.4 U15.4 U16.4
GND8: MK9.M R52.1 R54.1 SV9.4 U17.4 U18.4
GND9: MK10.M R58.1 R60.1 SV10.4 U19.4 U20.4
GND10: MK11.M R64.1 R66.1 SV11.4 U21.4 U22.4
GND11: MK12.M R70.1 R72.1 SV12.4 U23.4 U24.4
GND12: MK13.M R76.1 R78.1 SV13.4 U25.4 U26.4
GND13: MK14.M R82.1 R84.1 SV14.4 U27.4 U28.4
GND14: MK15.M R88.1 R90.1 SV15.4 U29.4 U30.4
GND15: MK16.M R94.1 R96.1 SV16.4 U31.4 U32.4
GND16: MK17.M R100.1 R102.1 SV17.4 U33.4 U34.4
GND17: MK18.M R106.1 R108.1 SV18.4 U35.4 U36.4
GND18: MK19.M R112.1 R114.1 SV19.4 U37.4 U38.4
GND19: MK20.M R118.1 R120.1 SV20.4 U39.4 U40.4
GND20: MK21.M R124.1 R126.1 SV21.4 U41.4 U42.4
N$1: D1.4 JP1.2
N$2: D1.5 JP2.2
N$3: D3.4 JP7.2
N$4: D3.5 JP8.2
N$5: D1.6 JP3.2
N$6: D2.4 JP4.2
N$7: D2.5 JP5.2
N$8: D2.6 JP6.2
N$9: D3.6 JP9.2
N$10: D4.4 JP10.2
N$11: D4.5 JP11.2
N$12: D4.6 JP12.2
N$13: D5.4 JP13.2
N$14: D5.5 JP14.2
N$15: D5.6 JP15.2
N$16: D6.4 JP16.2
N$17: D6.5 JP17.2
N$18: D6.6 JP18.2
N$19: D7.4 JP19.2
N$20: D7.5 JP20.2
N$21: D7.6 JP21.2
N$22: D8.4 JP22.2
N$23: D8.5 JP23.2
N$24: D8.6 JP24.2
N$25: D9.4 JP25.2
N$26: D9.5 JP26.2
N$27: D9.6 JP27.2
N$28: D10.4 JP28.2
N$29: D10.5 JP29.2
N$30: D10.6 JP30.2
N$31: D11.4 JP31.2
N$32: D11.5 JP32.2
N$33: D11.6 JP33.2
N$34: D12.4 JP34.2
N$35: D12.5 JP35.2
N$36: D12.6 JP36.2
N$37: D13.4 JP37.2
N$38: D13.5 JP38.2
N$39: D13.6 JP39.2
N$40: D14.4 JP40.2
N$41: D14.5 JP41.2
N$42: D14.6 JP42.2
N$43: D15.4 JP43.2
N$44: D15.5 JP44.2
N$45: D15.6 JP45.2
N$46: D16.4 JP46.2
N$47: D16.5 JP47.2
N$48: D16.6 JP48.2
N$49: D17.4 JP49.2
N$50: D17.5 JP50.2
N$51: D17.6 JP51.2
N$52: D18.4 JP52.2
N$53: D18.5 JP53.2
N$54: D18.6 JP54.2
N$55: D19.4 JP55.2
N$56: D19.5 JP56.2
N$57: D19.6 JP57.2
N$58: D20.4 JP58.2
N$59: D20.5 JP59.2
N$60: D20.6 JP60.2
N$61: D21.4 JP61.2
N$62: D21.5 JP62.2
N$63: D21.6 JP63.2
N$64: D22.4 JP64.2
N$65: D22.5 JP65.2
N$66: D22.6 JP66.2
N$67: D23.4 JP67.2
N$68: D23.5 JP68.2
N$69: D23.6 JP69.2
N$70: D24.4 JP70.2
N$71: D24.5 JP71.2
N$72: D24.6 JP72.2
N$73: D25.4 JP73.2
N$74: D25.5 JP74.2
N$75: D25.6 JP75.2
N$76: D26.4 JP76.2
N$77: D26.5 JP77.2
N$78: D26.6 JP78.2
N$79: D27.4 JP79.2
N$80: D27.5 JP80.2
N$81: D27.6 JP81.2
N$82: D28.4 JP82.2
N$83: D28.5 JP83.2
N$84: D28.6 JP84.2
N$85: D29.4 JP85.2
N$86: D29.5 JP86.2
N$87: D29.6 JP87.2
N$88: D30.4 JP88.2
N$89: D30.5 JP89.2
N$90: D30.6 JP90.2
N$91: D31.4 JP91.2
N$92: D31.5 JP92.2
N$93: D31.6 JP93.2
N$94: D32.4 JP94.2
N$95: D32.5 JP95.2
N$96: D32.6 JP96.2
N$97: D33.4 JP97.2
N$98: D33.5 JP98.2
N$99: D33.6 JP99.2
N$100: D34.4 JP100.2
N$101: D34.5 JP101.2
N$102: D34.6 JP102.2
N$103: D35.4 JP103.2
N$104: D35.5 JP104.2
N$105: D35.6 JP105.2
N$106: D36.4 JP106.2
N$107: D36.5 JP107.2
N$108: D36.6 JP108.2
N$109: D37.4 JP109.2
N$110: D37.5 JP110.2
N$111: D37.6 JP111.2
N$112: D38.4 JP112.2
N$113: D38.5 JP113.2
N$114: D38.6 JP114.2
N$115: D39.4 JP115.2
N$116: D39.5 JP116.2
N$117: D39.6 JP117.2
N$118: D40.4 JP118.2
N$119: D40.5 JP119.2
N$120: D40.6 JP120.2
N$121: D41.4 JP121.2
N$122: D41.5 JP122.2
N$123: D41.6 JP123.2
N$124: D42.4 JP124.2
N$125: D42.5 JP125.2
N$126: D42.6 JP126.2
O_L_GND: D1.1 D1.2 D1.3 R3.2
O_L_GND1: D3.1 D3.2 D3.3 R9.2
O_L_GND2: D5.1 D5.2 D5.3 R15.2
O_L_GND3: D7.1 D7.2 D7.3 R21.2
O_L_GND4: D9.1 D9.2 D9.3 R27.2
O_L_GND5: D11.1 D11.2 D11.3 R33.2
O_L_GND6: D13.1 D13.2 D13.3 R39.2
O_L_GND7: D15.1 D15.2 D15.3 R45.2
O_L_GND8: D17.1 D17.2 D17.3 R51.2
O_L_GND9: D19.1 D19.2 D19.3 R57.2
O_L_GND10: D21.1 D21.2 D21.3 R63.2
O_L_GND11: D23.1 D23.2 D23.3 R69.2
O_L_GND12: D25.1 D25.2 D25.3 R75.2
O_L_GND13: D27.1 D27.2 D27.3 R81.2
O_L_GND14: D29.1 D29.2 D29.3 R87.2
O_L_GND15: D31.1 D31.2 D31.3 R93.2
O_L_GND16: D33.1 D33.2 D33.3 R99.2
O_L_GND17: D35.1 D35.2 D35.3 R105.2
O_L_GND18: D37.1 D37.2 D37.3 R111.2
O_L_GND19: D39.1 D39.2 D39.3 R117.2
O_L_GND20: D41.1 D41.2 D41.3 R123.2
OUT: MK2.P R5.1
OUT1: MK1.P R11.1
OUT2: MK3.P R17.1
OUT3: MK4.P R23.1
OUT4: MK5.P R29.1
OUT5: MK6.P R35.1
OUT6: MK7.P R41.1
OUT7: MK8.P R47.1
OUT8: MK9.P R53.1
OUT9: MK10.P R59.1
OUT10: MK11.P R65.1
OUT11: MK12.P R71.1
OUT12: MK13.P R77.1
OUT13: MK14.P R83.1
OUT14: MK15.P R89.1
OUT15: MK16.P R95.1
OUT16: MK17.P R101.1
OUT17: MK18.P R107.1
OUT18: MK19.P R113.1
OUT19: MK20.P R119.1
OUT20: MK21.P R125.1
P_L_GND: D2.1 D2.2 D2.3 R4.2
P_L_GND1: D4.1 D4.2 D4.3 R10.2
P_L_GND2: D6.1 D6.2 D6.3 R16.2
P_L_GND3: D8.1 D8.2 D8.3 R22.2
P_L_GND4: D10.1 D10.2 D10.3 R28.2
P_L_GND5: D12.1 D12.2 D12.3 R34.2
P_L_GND6: D14.1 D14.2 D14.3 R40.2
P_L_GND7: D16.1 D16.2 D16.3 R46.2
P_L_GND8: D18.1 D18.2 D18.3 R52.2
P_L_GND9: D20.1 D20.2 D20.3 R58.2
P_L_GND10: D22.1 D22.2 D22.3 R64.2
P_L_GND11: D24.1 D24.2 D24.3 R70.2
P_L_GND12: D26.1 D26.2 D26.3 R76.2
P_L_GND13: D28.1 D28.2 D28.3 R82.2
P_L_GND14: D30.1 D30.2 D30.3 R88.2
P_L_GND15: D32.1 D32.2 D32.3 R94.2
P_L_GND16: D34.1 D34.2 D34.3 R100.2
P_L_GND17: D36.1 D36.2 D36.3 R106.2
P_L_GND18: D38.1 D38.2 D38.3 R112.2
P_L_GND19: D40.1 D40.2 D40.3 R118.2
P_L_GND20: D42.1 D42.2 D42.3 R124.2
VCC: U2.8
VCC1: U4.8
VCC2: U6.8
VCC3: U8.8
VCC4: U10.8
VCC5: U12.8
VCC6: U14.8
VCC7: U16.8
VCC8: U18.8
VCC9: U20.8
VCC10: U22.8
VCC11: U24.8
VCC12: U26.8
VCC13: U28.8
VCC14: U30.8
VCC15: U32.8
VCC16: U34.8
VCC17: U36.8
VCC18: U38.8
VCC19: U40.8
VCC20: U42.8

## Tracks (layer width: path | path; a pad name or v marks a point on that pad's centre or on a via)
2IN+  (via drill 0.35)
  Top 0.152: U1.3 7.44,6.73 v8.38,6.73 | v10.03,9.78 10.41,10.16 U2.5 | R6.2 13.08,27.9 13.08,25.69 R1.1 11.52,25.65 9.91,25.65 8.89,24.64 v8.89,24.26
  Bottom 0.152: v8.38,6.73 10.03,8.38 v10.03,9.78 12.95,12.7 12.95,23.5 11.56,24.89 9.53,24.89 v8.89,24.26
2IN+1  (via drill 0.35)
  Top 0.152: U3.3 21.1,6.73 v22.04,6.73 | v23.69,9.78 24.07,10.16 U4.5 | R12.2 26.74,27.9 26.74,25.69 R7.1 25.18,25.65 23.57,25.65 22.55,24.64 v22.55,24.26
  Bottom 0.152: v22.04,6.73 23.69,8.38 v23.69,9.78 26.61,12.7 26.61,23.5 25.22,24.89 23.18,24.89 v22.55,24.26
2IN+2  (via drill 0.35)
  Top 0.152: U5.3 34.76,6.73 v35.7,6.73 | v37.35,9.78 37.73,10.16 U6.5 | R18.2 40.4,27.9 40.4,25.69 R13.1 38.84,25.65 37.23,25.65 36.21,24.64 v36.21,24.26
  Bottom 0.152: v35.7,6.73 37.35,8.38 v37.35,9.78 40.27,12.7 40.27,23.5 38.88,24.89 36.84,24.89 v36.21,24.26
2IN+3  (via drill 0.35)
  Top 0.152: U7.3 48.42,6.73 v49.36,6.73 | v51.01,9.78 51.39,10.16 U8.5 | R24.2 54.06,27.9 54.06,25.69 R19.1 52.5,25.65 50.89,25.65 49.87,24.64 v49.87,24.26
  Bottom 0.152: v49.36,6.73 51.01,8.38 v51.01,9.78 53.93,12.7 53.93,23.5 52.54,24.89 50.51,24.89 v49.87,24.26
2IN+4  (via drill 0.35)
  Top 0.152: U9.3 62.08,6.73 v63.02,6.73 | v64.67,9.78 65.05,10.16 U10.5 | R30.2 67.72,27.9 67.72,25.69 R25.1 66.16,25.65 64.55,25.65 63.53,24.64 v63.53,24.26
  Bottom 0.152: v63.02,6.73 64.67,8.38 v64.67,9.78 67.59,12.7 67.59,23.5 66.2,24.89 64.17,24.89 v63.53,24.26
2IN+5  (via drill 0.35)
  Top 0.152: U11.3 75.74,6.73 v76.68,6.73 | v78.33,9.78 78.72,10.16 U12.5 | R36.2 81.38,27.9 81.38,25.69 R31.1 79.82,25.65 78.21,25.65 77.19,24.64 v77.19,24.26
  Bottom 0.152: v76.68,6.73 78.33,8.38 v78.33,9.78 81.25,12.7 81.25,23.5 79.86,24.89 77.83,24.89 v77.19,24.26
2IN+6  (via drill 0.35)
  Top 0.152: U13.3 89.4,6.73 v90.34,6.73 | v91.99,9.78 92.38,10.16 U14.5 | R42.2 95.04,27.9 95.04,25.69 R37.1 93.48,25.65 91.87,25.65 90.85,24.64 v90.85,24.26
  Bottom 0.152: v90.34,6.73 91.99,8.38 v91.99,9.78 94.92,12.7 94.92,23.5 93.52,24.89 91.49,24.89 v90.85,24.26
2IN+7  (via drill 0.35)
  Top 0.152: U15.3 7.44,36.71 v8.38,36.71 | v10.03,39.76 10.41,40.14 U16.5 | R48.2 13.08,57.88 13.08,55.67 R43.1 11.52,55.63 9.91,55.63 8.89,54.62 v8.89,54.24
  Bottom 0.152: v8.38,36.71 10.03,38.36 v10.03,39.76 12.95,42.68 12.95,53.48 11.56,54.87 9.53,54.87 v8.89,54.24
2IN+8  (via drill 0.35)
  Top 0.152: U17.3 21.1,36.71 v22.04,36.71 | v23.69,39.76 24.07,40.14 U18.5 | R54.2 26.74,57.88 26.74,55.67 R49.1 25.18,55.63 23.57,55.63 22.55,54.62 v22.55,54.24
  Bottom 0.152: v22.04,36.71 23.69,38.36 v23.69,39.76 26.61,42.68 26.61,53.48 25.22,54.87 23.18,54.87 v22.55,54.24
2IN+9  (via drill 0.35)
  Top 0.152: U19.3 34.76,36.71 v35.7,36.71 | v37.35,39.76 37.73,40.14 U20.5 | R60.2 40.4,57.88 40.4,55.67 R55.1 38.84,55.63 37.23,55.63 36.21,54.62 v36.21,54.24
  Bottom 0.152: v35.7,36.71 37.35,38.36 v37.35,39.76 40.27,42.68 40.27,53.48 38.88,54.87 36.84,54.87 v36.21,54.24
2IN+10  (via drill 0.35)
  Top 0.152: U21.3 48.42,36.71 v49.36,36.71 | v51.01,39.76 51.39,40.14 U22.5 | R66.2 54.06,57.88 54.06,55.67 R61.1 52.5,55.63 50.89,55.63 49.87,54.62 v49.87,54.24
  Bottom 0.152: v49.36,36.71 51.01,38.36 v51.01,39.76 53.93,42.68 53.93,53.48 52.54,54.87 50.51,54.87 v49.87,54.24
2IN+11  (via drill 0.35)
  Top 0.152: U23.3 62.08,36.71 v63.02,36.71 | v64.67,39.76 65.05,40.14 U24.5 | R72.2 67.72,57.88 67.72,55.67 R67.1 66.16,55.63 64.55,55.63 63.53,54.62 v63.53,54.24
  Bottom 0.152: v63.02,36.71 64.67,38.36 v64.67,39.76 67.59,42.68 67.59,53.48 66.2,54.87 64.17,54.87 v63.53,54.24
2IN+12  (via drill 0.35)
  Top 0.152: U25.3 75.74,36.71 v76.68,36.71 | v78.33,39.76 78.72,40.14 U26.5 | R78.2 81.38,57.88 81.38,55.67 R73.1 79.82,55.63 78.21,55.63 77.19,54.62 v77.19,54.24
  Bottom 0.152: v76.68,36.71 78.33,38.36 v78.33,39.76 81.25,42.68 81.25,53.48 79.86,54.87 77.83,54.87 v77.19,54.24
2IN+13  (via drill 0.35)
  Top 0.152: U27.3 89.4,36.71 v90.34,36.71 | v91.99,39.76 92.38,40.14 U28.5 | R84.2 95.04,57.88 95.04,55.67 R79.1 93.48,55.63 91.87,55.63 90.85,54.62 v90.85,54.24
  Bottom 0.152: v90.34,36.71 91.99,38.36 v91.99,39.76 94.92,42.68 94.92,53.48 93.52,54.87 91.49,54.87 v90.85,54.24
2IN+14  (via drill 0.35)
  Top 0.152: U29.3 7.44,66.69 v8.38,66.69 | v10.03,69.74 10.41,70.12 U30.5 | R90.2 13.08,87.86 13.08,85.65 R85.1 11.52,85.61 9.91,85.61 8.89,84.6 v8.89,84.22
  Bottom 0.152: v8.38,66.69 10.03,68.34 v10.03,69.74 12.95,72.66 12.95,83.45 11.56,84.85 9.53,84.85 v8.89,84.22
2IN+15  (via drill 0.35)
  Top 0.152: U31.3 21.1,66.69 v22.04,66.69 | v23.69,69.74 24.07,70.12 U32.5 | R96.2 26.74,87.86 26.74,85.65 R91.1 25.18,85.61 23.57,85.61 22.55,84.6 v22.55,84.22
  Bottom 0.152: v22.04,66.69 23.69,68.34 v23.69,69.74 26.61,72.66 26.61,83.45 25.22,84.85 23.18,84.85 v22.55,84.22
2IN+16  (via drill 0.35)
  Top 0.152: U33.3 34.76,66.69 v35.7,66.69 | v37.35,69.74 37.73,70.12 U34.5 | R102.2 40.4,87.86 40.4,85.65 R97.1 38.84,85.61 37.23,85.61 36.21,84.6 v36.21,84.22
  Bottom 0.152: v35.7,66.69 37.35,68.34 v37.35,69.74 40.27,72.66 40.27,83.45 38.88,84.85 36.84,84.85 v36.21,84.22
2IN+17  (via drill 0.35)
  Top 0.152: U35.3 48.42,66.69 v49.36,66.69 | v51.01,69.74 51.39,70.12 U36.5 | R108.2 54.06,87.86 54.06,85.65 R103.1 52.5,85.61 50.89,85.61 49.87,84.6 v49.87,84.22
  Bottom 0.152: v49.36,66.69 51.01,68.34 v51.01,69.74 53.93,72.66 53.93,83.45 52.54,84.85 50.51,84.85 v49.87,84.22
2IN+18  (via drill 0.35)
  Top 0.152: U37.3 62.08,66.69 v63.02,66.69 | v64.67,69.74 65.05,70.12 U38.5 | R114.2 67.72,87.86 67.72,85.65 R109.1 66.16,85.61 64.55,85.61 63.53,84.6 v63.53,84.22
  Bottom 0.152: v63.02,66.69 64.67,68.34 v64.67,69.74 67.59,72.66 67.59,83.45 66.2,84.85 64.17,84.85 v63.53,84.22
2IN+19  (via drill 0.35)
  Top 0.152: U39.3 75.74,66.69 v76.68,66.69 | v78.33,69.74 78.72,70.12 U40.5 | R120.2 81.38,87.86 81.38,85.65 R115.1 79.82,85.61 78.21,85.61 77.19,84.6 v77.19,84.22
  Bottom 0.152: v76.68,66.69 78.33,68.34 v78.33,69.74 81.25,72.66 81.25,83.45 79.86,84.85 77.83,84.85 v77.19,84.22
2IN+20  (via drill 0.35)
  Top 0.152: U41.3 89.4,66.69 v90.34,66.69 | v91.99,69.74 92.38,70.12 U42.5 | R126.2 95.04,87.86 95.04,85.65 R121.1 93.48,85.61 91.87,85.61 90.85,84.6 v90.85,84.22
  Bottom 0.152: v90.34,66.69 91.99,68.34 v91.99,69.74 94.92,72.66 94.92,83.45 93.52,84.85 91.49,84.85 v90.85,84.22
2OUT
  Top 0.152: R3.1 1.82,25.91 3.43,25.91 3.81,25.53 3.81,19.18 4.7,18.29 5.37,18.29 6.79,16.99 6.79,15.14 6.93,15.01 7.85,15.01 10.16,12.7 U2.7
2OUT1
  Top 0.152: R9.1 15.48,25.91 17.09,25.91 17.47,25.53 17.47,19.18 18.36,18.29 19.03,18.29 20.45,16.99 20.45,15.14 20.59,15.01 21.51,15.01 23.82,12.7 U4.7
2OUT2
  Top 0.152: R15.1 29.14,25.91 30.75,25.91 31.13,25.53 31.13,19.18 32.02,18.29 32.69,18.29 34.12,16.99 34.12,15.14 34.25,15.01 35.17,15.01 37.48,12.7 U6.7
2OUT3
  Top 0.152: R21.1 42.8,25.91 44.41,25.91 44.79,25.53 44.79,19.18 45.68,18.29 46.35,18.29 47.77,16.99 47.77,15.14 47.91,15.01 48.83,15.01 51.14,12.7 U8.7
2OUT4
  Top 0.152: R27.1 56.46,25.91 58.07,25.91 58.45,25.53 58.45,19.18 59.34,18.29 60.01,18.29 61.44,16.99 61.44,15.14 61.57,15.01 62.49,15.01 64.8,12.7 U10.7
2OUT5
  Top 0.152: R33.1 70.12,25.91 71.73,25.91 72.11,25.53 72.11,19.18 73,18.29 73.67,18.29 75.09,16.99 75.09,15.14 75.23,15.01 76.15,15.01 78.46,12.7 U12.7
2OUT6
  Top 0.152: R39.1 83.78,25.91 85.39,25.91 85.77,25.53 85.77,19.18 86.66,18.29 87.33,18.29 88.75,16.99 88.75,15.14 88.89,15.01 89.81,15.01 92.12,12.7 U14.7
2OUT7
  Top 0.152: R45.1 1.82,55.89 3.43,55.89 3.81,55.51 3.81,49.16 4.7,48.27 5.37,48.27 6.79,46.97 6.79,45.12 6.93,44.99 7.85,44.99 10.16,42.68 U16.7
2OUT8
  Top 0.152: R51.1 15.48,55.89 17.09,55.89 17.47,55.51 17.47,49.16 18.36,48.27 19.03,48.27 20.45,46.97 20.45,45.12 20.59,44.99 21.51,44.99 23.82,42.68 U18.7
2OUT9
  Top 0.152: R57.1 29.14,55.89 30.75,55.89 31.13,55.51 31.13,49.16 32.02,48.27 32.69,48.27 34.12,46.97 34.12,45.12 34.25,44.99 35.17,44.99 37.48,42.68 U20.7
2OUT10
  Top 0.152: R63.1 42.8,55.89 44.41,55.89 44.79,55.51 44.79,49.16 45.68,48.27 46.35,48.27 47.77,46.97 47.77,45.12 47.91,44.99 48.83,44.99 51.14,42.68 U22.7
2OUT11
  Top 0.152: R69.1 56.46,55.89 58.07,55.89 58.45,55.51 58.45,49.16 59.34,48.27 60.01,48.27 61.44,46.97 61.44,45.12 61.57,44.99 62.49,44.99 64.8,42.68 U24.7
2OUT12
  Top 0.152: R75.1 70.12,55.89 71.73,55.89 72.11,55.51 72.11,49.16 73,48.27 73.67,48.27 75.09,46.97 75.09,45.12 75.23,44.99 76.15,44.99 78.46,42.68 U26.7
2OUT13
  Top 0.152: R81.1 83.78,55.89 85.39,55.89 85.77,55.51 85.77,49.16 86.66,48.27 87.33,48.27 88.75,46.97 88.75,45.12 88.89,44.99 89.81,44.99 92.12,42.68 U28.7
2OUT14
  Top 0.152: R87.1 1.82,85.87 3.43,85.87 3.81,85.49 3.81,79.14 4.7,78.25 5.37,78.25 6.79,76.94 6.79,75.11 6.93,74.97 7.85,74.97 10.16,72.66 U30.7
2OUT15
  Top 0.152: R93.1 15.48,85.87 17.09,85.87 17.47,85.49 17.47,79.14 18.36,78.25 19.03,78.25 20.45,76.94 20.45,75.11 20.59,74.97 21.51,74.97 23.82,72.66 U32.7
2OUT16
  Top 0.152: R99.1 29.14,85.87 30.75,85.87 31.13,85.49 31.13,79.14 32.02,78.25 32.69,78.25 34.12,76.94 34.12,75.11 34.25,74.97 35.17,74.97 37.48,72.66 U34.7
2OUT17
  Top 0.152: R105.1 42.8,85.87 44.41,85.87 44.79,85.49 44.79,79.14 45.68,78.25 46.35,78.25 47.77,76.94 47.77,75.11 47.91,74.97 48.83,74.97 51.14,72.66 U36.7
2OUT18
  Top 0.152: R111.1 56.46,85.87 58.07,85.87 58.45,85.49 58.45,79.14 59.34,78.25 60.01,78.25 61.44,76.94 61.44,75.11 61.57,74.97 62.49,74.97 64.8,72.66 U38.7
2OUT19
  Top 0.152: R117.1 70.12,85.87 71.73,85.87 72.11,85.49 72.11,79.14 73,78.25 73.67,78.25 75.09,76.94 75.09,75.11 75.23,74.97 76.15,74.97 78.46,72.66 U40.7
2OUT20
  Top 0.152: R123.1 83.78,85.87 85.39,85.87 85.77,85.49 85.77,79.14 86.66,78.25 87.33,78.25 88.75,76.94 88.75,75.11 88.89,74.97 89.81,74.97 92.12,72.66 U42.7
3V1  (via drill 0.35)
  Top 0.152: VR2.2 VR2.3 v16.45,13.46 | VR2.2 16.45,8.4 15.62,7.56 15.62,3.38 SV2.1 | R7.2 22.34,22.99 22.34,18.86 23.74,17.45 23.82,17.37 | 23.82,17.37 24.24,16.95 | 24.24,16.95 JP12.1 | 24.24,16.95 23.82,16.95 | 23.82,16.95 23.77,16.95 23.43,16.61 23.43,16.14 JP11.1 23.09,15.88 22.23,16.74 21.4,16.74 21.27,16.61 21.27,16.14 JP10.1 21.03,15.9 v21.03,17.4 | JP7.1 14.52,16.74 v15.31,17.53 15.95,18.16 15.95,21.84 16.71,22.61 16.71,23.11 16.33,23.5 15.86,23.5 14.59,24.77 R8.2 | JP8.1 16.95,16.14 16.95,16.61 17.47,17.12 v17.47,17.4 | v18.84,17.62 18.87,17.64 18.87,17.65 v18.84,17.63 JP9.1 18.84,14.88 v18.87,14.86 19.1,14.63 19.1,13.44 v18.99,13.34 | U3.8 23.57,8.64 22.55,9.65 v22.55,11.3 | v17.47,8.51 17.34,8.51 VR2.2 | 23.82,16.95 23.82,17.37
  Bottom 0.152: v15.31,17.53 17.34,17.53 v17.47,17.4 17.69,17.62 v18.84,17.62 | v18.87,14.86 21.03,17.02 v21.03,17.4 | v22.55,11.3 19.76,8.51 v17.47,8.51 | v16.45,13.46 18.87,13.46 v18.99,13.34
3V2  (via drill 0.35)
  Top 0.152: VR3.2 VR3.3 v30.11,13.46 | VR3.2 30.11,8.4 29.28,7.56 29.28,3.38 SV3.1 | R13.2 35.99,22.99 35.99,18.86 37.4,17.45 37.48,17.37 | 37.48,17.37 37.9,16.95 | 37.9,16.95 JP18.1 | 37.9,16.95 37.48,16.95 | 37.48,16.95 37.44,16.95 37.09,16.61 37.09,16.14 JP17.1 36.75,15.88 35.89,16.74 35.06,16.74 34.93,16.61 34.93,16.14 JP16.1 34.69,15.9 v34.69,17.4 | JP13.1 28.18,16.74 v28.97,17.53 29.61,18.16 29.61,21.84 30.37,22.61 30.37,23.11 29.99,23.5 29.52,23.5 28.25,24.77 R14.2 | JP14.1 30.61,16.14 30.61,16.61 31.13,17.12 v31.13,17.4 | v32.5,17.62 32.53,17.64 32.53,17.65 v32.5,17.63 JP15.1 32.5,14.88 v32.53,14.86 32.76,14.63 32.76,13.44 v32.65,13.34 | U5.8 37.23,8.64 36.21,9.65 v36.21,11.3 | v31.13,8.51 31,8.51 VR3.2 | 37.48,16.95 37.48,17.37
  Bottom 0.152: v28.97,17.53 31,17.53 v31.13,17.4 31.35,17.62 v32.5,17.62 | v32.53,14.86 34.69,17.02 v34.69,17.4 | v36.21,11.3 33.42,8.51 v31.13,8.51 | v30.11,13.46 32.53,13.46 v32.65,13.34
3V3  (via drill 0.35)
  Top 0.152: VR1.2 VR1.3 v2.79,13.46 | VR1.2 2.79,8.4 1.96,7.56 1.96,3.38 SV1.1 | R1.2 8.68,22.99 8.68,18.86 10.08,17.45 10.16,17.37 | 10.16,17.37 10.58,16.95 | 10.58,16.95 JP6.1 | 10.58,16.95 10.16,16.95 | 10.16,16.95 10.12,16.95 9.77,16.61 9.77,16.14 JP5.1 9.43,15.88 8.57,16.74 7.74,16.74 7.61,16.61 7.61,16.14 JP4.1 7.37,15.9 v7.37,17.4 | JP1.1 0.86,16.74 v1.65,17.53 2.29,18.16 2.29,21.84 3.05,22.61 3.05,23.11 2.67,23.5 2.2,23.5 0.93,24.77 R2.2 | JP2.1 3.29,16.14 3.29,16.61 3.81,17.12 v3.81,17.4 | v5.18,17.62 5.21,17.64 5.21,17.65 v5.18,17.63 JP3.1 5.18,14.88 v5.21,14.86 5.44,14.63 5.44,13.44 v5.33,13.34 | U1.8 9.91,8.64 8.89,9.65 v8.89,11.3 | v3.81,8.51 3.68,8.51 VR1.2 | 10.16,16.95 10.16,17.37
  Bottom 0.152: v1.65,17.53 3.68,17.53 v3.81,17.4 4.03,17.62 v5.18,17.62 | v5.21,14.86 7.37,17.02 v7.37,17.4 | v8.89,11.3 6.1,8.51 v3.81,8.51 | v2.79,13.46 5.21,13.46 v5.33,13.34
3V4  (via drill 0.35)
  Top 0.152: VR4.2 VR4.3 v43.77,13.46 | VR4.2 43.77,8.4 42.94,7.56 42.94,3.38 SV4.1 | R19.2 49.66,22.99 49.66,18.86 51.06,17.45 51.14,17.37 | 51.14,17.37 51.56,16.95 | 51.56,16.95 JP24.1 | 51.56,16.95 51.14,16.95 | 51.14,16.95 51.1,16.95 50.75,16.61 50.75,16.14 JP23.1 50.41,15.88 49.55,16.74 48.72,16.74 48.59,16.61 48.59,16.14 JP22.1 48.35,15.9 v48.35,17.4 | JP19.1 41.84,16.74 v42.63,17.53 43.27,18.16 43.27,21.84 44.03,22.61 44.03,23.11 43.65,23.5 43.18,23.5 41.91,24.77 R20.2 | JP20.1 44.27,16.14 44.27,16.61 44.79,17.12 v44.79,17.4 | v46.16,17.62 46.19,17.64 46.19,17.65 v46.16,17.63 JP21.1 46.16,14.88 v46.19,14.86 46.42,14.63 46.42,13.44 v46.31,13.34 | U7.8 50.89,8.64 49.87,9.65 v49.87,11.3 | v44.79,8.51 44.66,8.51 VR4.2 | 51.14,16.95 51.14,17.37
  Bottom 0.152: v42.63,17.53 44.66,17.53 v44.79,17.4 45.01,17.62 v46.16,17.62 | v46.19,14.86 48.35,17.02 v48.35,17.4 | v49.87,11.3 47.08,8.51 v44.79,8.51 | v43.77,13.46 46.19,13.46 v46.31,13.34
3V5  (via drill 0.35)
  Top 0.152: VR5.2 VR5.3 v57.43,13.46 | VR5.2 57.43,8.4 56.6,7.56 56.6,3.38 SV5.1 | R25.2 63.31,22.99 63.31,18.86 64.72,17.45 64.8,17.37 | 64.8,17.37 65.22,16.95 | 65.22,16.95 JP30.1 | 65.22,16.95 64.8,16.95 | 64.8,16.95 64.76,16.95 64.41,16.61 64.41,16.14 JP29.1 64.07,15.88 63.21,16.74 62.38,16.74 62.25,16.61 62.25,16.14 JP28.1 62.01,15.9 v62.01,17.4 | JP25.1 55.5,16.74 v56.29,17.53 56.93,18.16 56.93,21.84 57.69,22.61 57.69,23.11 57.31,23.5 56.84,23.5 55.57,24.77 R26.2 | JP26.1 57.93,16.14 57.93,16.61 58.45,17.12 v58.45,17.4 | v59.82,17.62 59.85,17.64 59.85,17.65 v59.82,17.63 JP27.1 59.82,14.88 v59.85,14.86 60.08,14.63 60.08,13.44 v59.97,13.34 | U9.8 64.55,8.64 63.53,9.65 v63.53,11.3 | v58.45,8.51 58.32,8.51 VR5.2 | 64.8,16.95 64.8,17.37
  Bottom 0.152: v56.29,17.53 58.32,17.53 v58.45,17.4 58.67,17.62 v59.82,17.62 | v59.85,14.86 62.01,17.02 v62.01,17.4 | v63.53,11.3 60.74,8.51 v58.45,8.51 | v57.43,13.46 59.85,13.46 v59.97,13.34
3V6  (via drill 0.35)
  Top 0.152: VR6.2 VR6.3 v71.09,13.46 | VR6.2 71.09,8.4 70.26,7.56 70.26,3.38 SV6.1 | R31.2 76.98,22.99 76.98,18.86 78.38,17.45 78.46,17.37 | 78.46,17.37 78.88,16.95 | 78.88,16.95 JP36.1 | 78.88,16.95 78.46,16.95 | 78.46,16.95 78.42,16.95 78.07,16.61 78.07,16.14 JP35.1 77.73,15.88 76.87,16.74 76.04,16.74 75.91,16.61 75.91,16.14 JP34.1 75.67,15.9 v75.67,17.4 | JP31.1 69.16,16.74 v69.95,17.53 70.59,18.16 70.59,21.84 71.35,22.61 71.35,23.11 70.97,23.5 70.5,23.5 69.23,24.77 R32.2 | JP32.1 71.59,16.14 71.59,16.61 72.11,17.12 v72.11,17.4 | v73.48,17.62 73.51,17.64 73.51,17.65 v73.48,17.63 JP33.1 73.48,14.88 v73.51,14.86 73.74,14.63 73.74,13.44 v73.64,13.34 | U11.8 78.21,8.64 77.19,9.65 v77.19,11.3 | v72.11,8.51 71.98,8.51 VR6.2 | 78.46,16.95 78.46,17.37
  Bottom 0.152: v69.95,17.53 71.98,17.53 v72.11,17.4 72.33,17.62 v73.48,17.62 | v73.51,14.86 75.67,17.02 v75.67,17.4 | v77.19,11.3 74.4,8.51 v72.11,8.51 | v71.09,13.46 73.51,13.46 v73.64,13.34
3V7  (via drill 0.35)
  Top 0.152: VR7.2 VR7.3 v84.75,13.46 | VR7.2 84.75,8.4 83.92,7.56 83.92,3.38 SV7.1 | R37.2 90.64,22.99 90.64,18.86 92.05,17.45 92.12,17.37 | 92.12,17.37 92.54,16.95 | 92.54,16.95 JP42.1 | 92.54,16.95 92.12,16.95 | 92.12,16.95 92.08,16.95 91.73,16.61 91.73,16.14 JP41.1 91.39,15.88 90.53,16.74 89.7,16.74 89.57,16.61 89.57,16.14 JP40.1 89.33,15.9 v89.33,17.4 | JP37.1 82.82,16.74 v83.61,17.53 84.25,18.16 84.25,21.84 85.01,22.61 85.01,23.11 84.63,23.5 84.16,23.5 82.89,24.77 R38.2 | JP38.1 85.25,16.14 85.25,16.61 85.77,17.12 v85.77,17.4 | v87.14,17.62 87.17,17.64 87.17,17.65 v87.14,17.63 JP39.1 87.14,14.88 v87.17,14.86 87.4,14.63 87.4,13.44 v87.3,13.34 | U13.8 91.87,8.64 90.85,9.65 v90.85,11.3 | v85.77,8.51 85.64,8.51 VR7.2 | 92.12,16.95 92.12,17.37
  Bottom 0.152: v83.61,17.53 85.64,17.53 v85.77,17.4 85.99,17.62 v87.14,17.62 | v87.17,14.86 89.33,17.02 v89.33,17.4 | v90.85,11.3 88.06,8.51 v85.77,8.51 | v84.75,13.46 87.17,13.46 v87.3,13.34
3V8  (via drill 0.35)